# Altium PCB Humidifier.PcbDoc
Units mm, origin at the board's own origin, x right, y up, seen from the top; angles counter-clockwise.
Board outline 35.25 x 32.02 mm, 2 copper layers (Top Layer, Bottom Layer); 24 components, 20 nets, 100 pads, 52 vias.
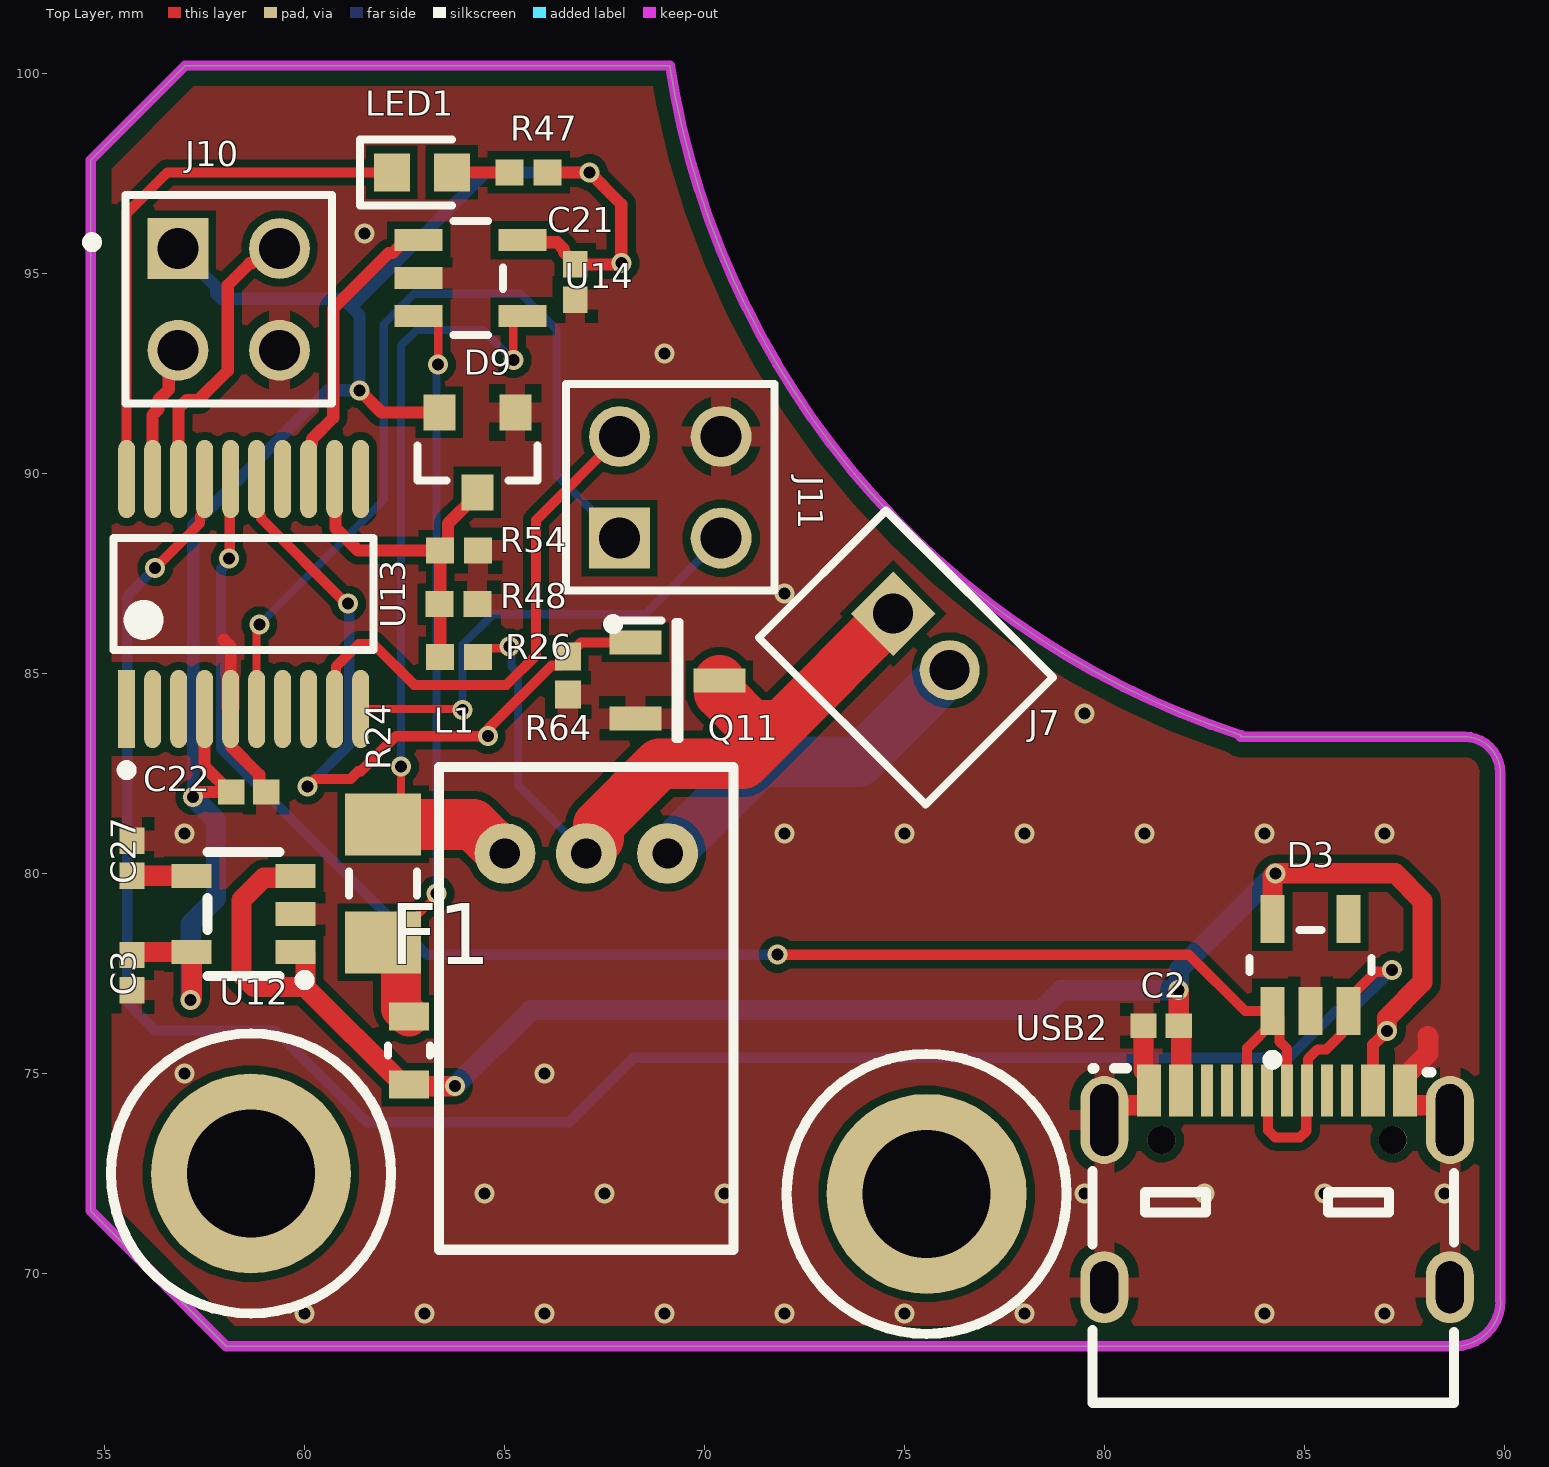
[diagram p0: Top Layer view]
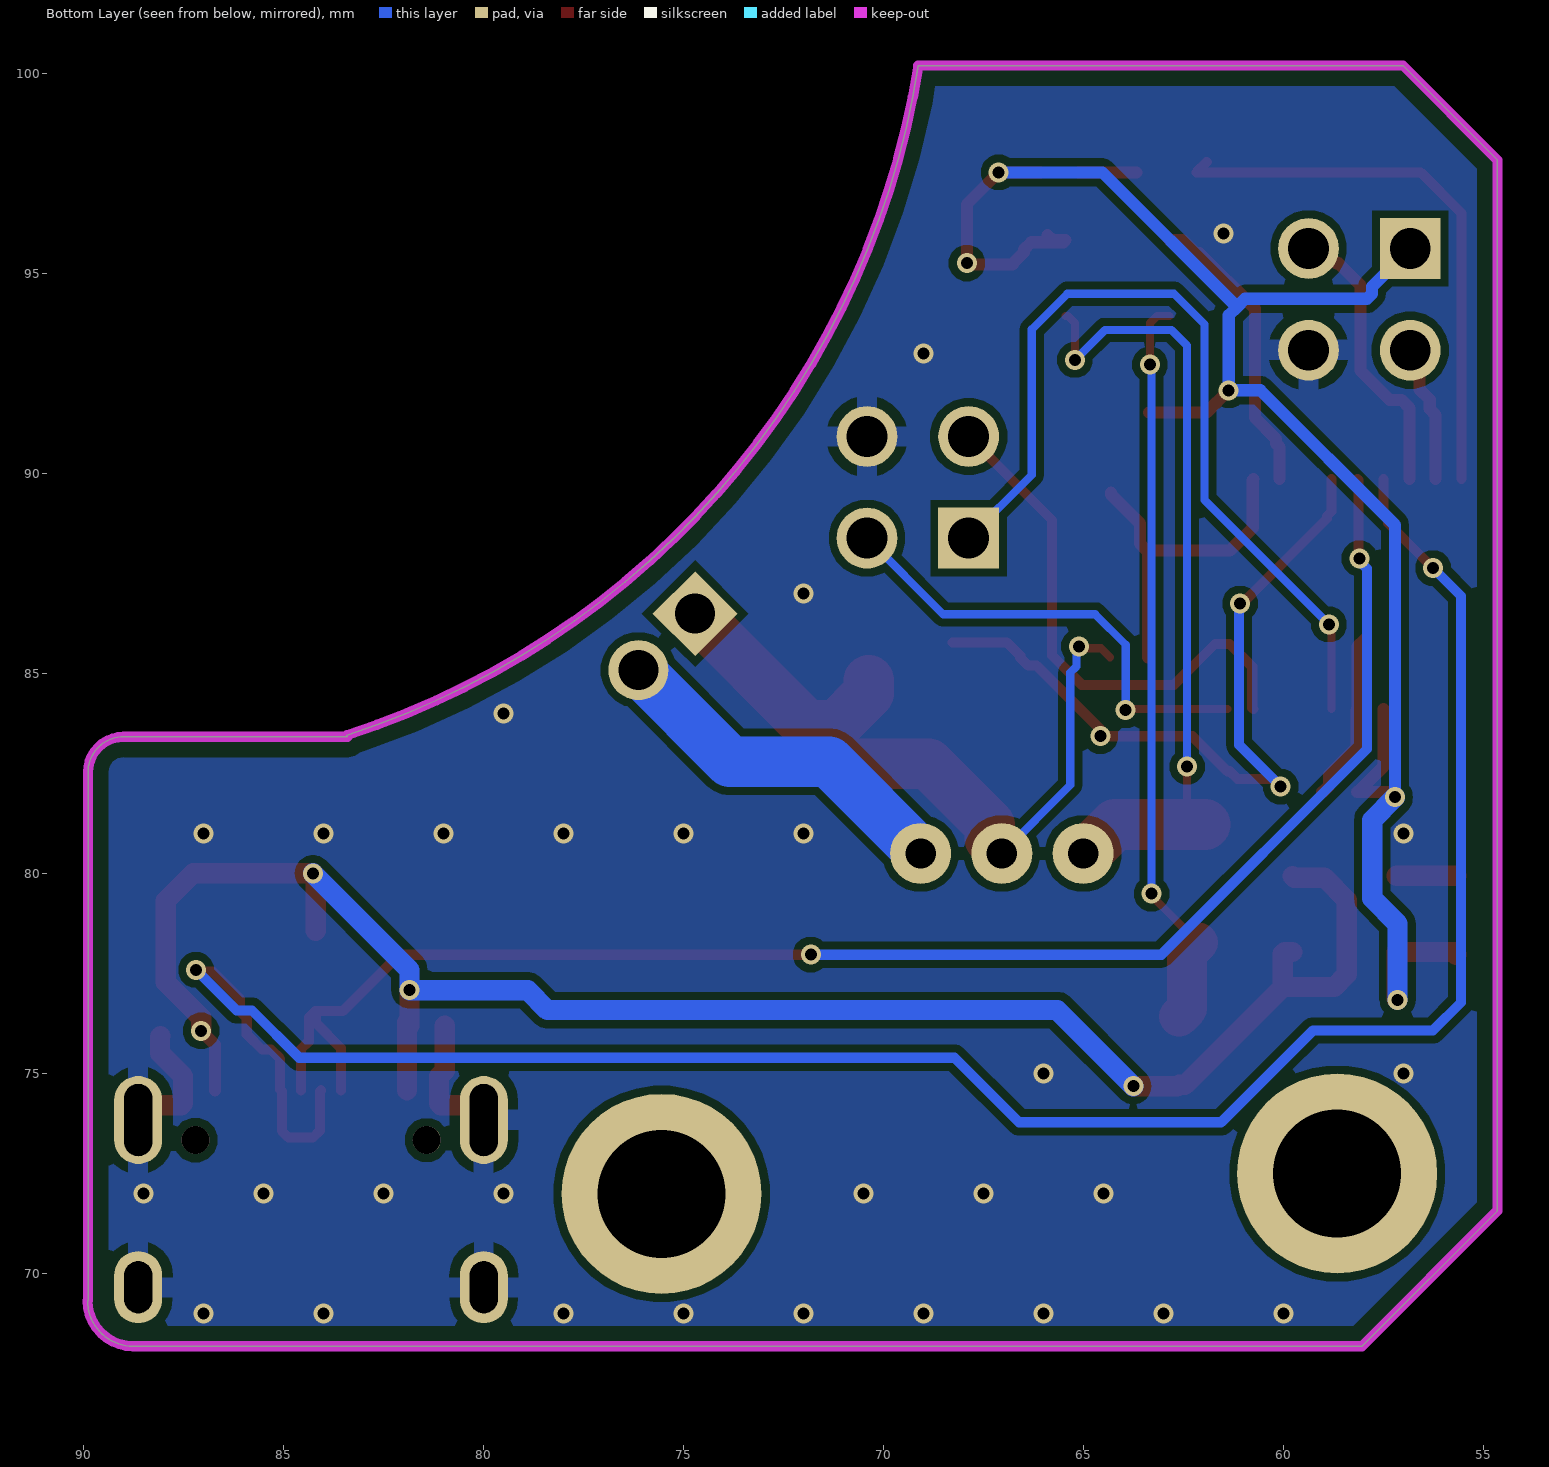
[diagram p1: Bottom Layer view, seen from below]

## Layer stack, top to bottom
Top Solder: solder mask 0.0102, Solder Resist, Dk 3.5
Top Layer: signal copper 0.0356
Dielectric 1: dielectric 0.32, FR-4, Dk 4.8
Bottom Layer: signal copper 0.0356
Bottom Solder: solder mask 0.0102, Solder Resist, Dk 3.5

## Board outline
54.654,71.56 54.654,97.834 57.013,100.193 69.124,100.193 69.13,100.194 ccw(c89.879,103.435) 83.416,83.454 83.402,83.412 89,83.412 cw(c89,82.525) 89.888,82.525 89.888,69.319 89.9,69.319 cw(c88.757,69.319) 88.757,68.176 58.038,68.176

## Design rules (kind name [scope] priority, off if disabled: settings)
AssemblyTestPointUsage AssemblyTestPointUsage_1 [All] p2:
AssemblyTestpoint AssemblyTestpoint_1 [All] p2: testpointundercomponent=TRUE minsize=1.016 maxsize=2.54 preferedsize=1.524 minholesize=0 maxholesize=1.016 preferedholesize=0.813 testpointgrid=0.025 usegrid=TRUE gridtolerance=0 allowsidetop=TRUE allowsidebottom=TRUE
Clearance "Board outline clearance" [All vs OnLayer('Keep-Out Layer')] p1: gap=0.381 ignorepadtopadclearanceinfootprint=FALSE except(0: Arc-Hole Track-Hole SMDPad-Hole THPad-Hole Via-Hole Fill-Hole Poly-Hole Region-Hole Text-Hole)
Clearance Clearance_1 [All] p2: gap=0.2 ignorepadtopadclearanceinfootprint=FALSE except(0: Arc-Hole Track-Hole SMDPad-Hole THPad-Hole Via-Hole Fill-Hole Poly-Hole Region-Hole Text-Hole; 0.17: SMDPad-SMDPad; 0.254: Track-Via; 0.33: Track-THPad)
ComponentClearance [InComponent('L1')] p1: gap=0 collisioncheckmode=3 verticalgap=0.254 showdistances=FALSE
ComponentClearance UFL [InComponent('RF_CON1')] p2: gap=0 collisioncheckmode=3 verticalgap=0.254 showdistances=FALSE
ComponentClearance ComponentClearance_1 [All] p3: gap=0.254 collisioncheckmode=3 verticalgap=0.254 showdistances=FALSE
DiffPairsRouting [All] p1: maxlimit=0.254 minlimit=0.203 mostfreqgap=0.254 toplayer_minwidth=0.203 toplayer_maxwidth=0.381 toplayer_prefwidth=0.381 bottomlayer_minwidth=0.203 bottomlayer_maxwidth=0.381 bottomlayer_prefwidth=0.381 maxuncoupledlength=12.7
DiffPairsRouting DiffPairsRouting_1 [All] p2: maxlimit=0.254 minlimit=0.254 mostfreqgap=0.254 toplayer_minwidth=0.381 toplayer_maxwidth=0.381 toplayer_prefwidth=0.381 bottomlayer_minwidth=0.381 bottomlayer_maxwidth=0.381 bottomlayer_prefwidth=0.381 maxuncoupledlength=12.7
FabricationTestPointUsage FabricationTestPointUsage_1 [All] p2: valid=0 allowmultiple=FALSE
FabricationTestpoint FabricationTestpoint_1 [All] p2: side=3 testpointundercomponent=TRUE minsize=1.016 maxsize=2.54 preferedsize=1.524 minholesize=0 maxholesize=1.016 preferedholesize=0.813 testpointgrid=0.025 allowsidetop=TRUE allowsidebottom=TRUE usegrid=TRUE gridtolerance=0
FanoutControl Fanout_LCC [IsLCC] p1: bgadir=Out bgaviamode=Centered fanoutstyle=Auto fanoutdirection=Alternating viagrid=0.025 // Fanout_LCC (Default Rule)
FanoutControl Fanout_BGA [IsBGA] p2: bgadir=Out bgaviamode=Centered fanoutstyle=Auto fanoutdirection=Alternating viagrid=0.025 // Fanout_BGA (Default Rule)
FanoutControl Fanout_Small [(CompPinCount < 5)] p3: bgadir=Out bgaviamode=Centered fanoutstyle=Auto fanoutdirection=OutThenIn viagrid=0.025 // Fanout_Small (Default Rule)
FanoutControl Fanout_SOIC [IsSOIC] p4: bgadir=Out bgaviamode=Centered fanoutstyle=Auto fanoutdirection=Alternating viagrid=0.025 // Fanout_SOIC (Default Rule)
FanoutControl Fanout_BGA_1 [IsBGA] p6: bgadir=Out bgaviamode=Centered fanoutstyle=Auto fanoutdirection=Alternating viagrid=0.025 // Fanout_BGA (Default Rule)
FanoutControl Fanout_LCC_1 [IsLCC] p7: bgadir=Out bgaviamode=Centered fanoutstyle=Auto fanoutdirection=Alternating viagrid=0.025 // Fanout_LCC (Default Rule)
FanoutControl Fanout_SOIC_1 [IsSOIC] p8: bgadir=Out bgaviamode=Centered fanoutstyle=Auto fanoutdirection=Alternating viagrid=0.025 // Fanout_SOIC (Default Rule)
FanoutControl Fanout_Small_1 [(CompPinCount < 5)] p9: bgadir=Out bgaviamode=Centered fanoutstyle=Auto fanoutdirection=OutThenIn viagrid=0.025 // Fanout_Small (Default Rule)
FanoutControl Fanout_Default_1 [All] p10: bgadir=Out bgaviamode=Centered fanoutstyle=Auto fanoutdirection=Alternating viagrid=0.025 // Fanout_Default (Default Rule)
Height Height_1 [All] p1: minheight=0 maxheight=50 prefheight=12.7
HoleSize HoleSize_1 [All] p1: absolutevalues=TRUE maxlimit=15 minlimit=0.2 maxpercent=80.000 minpercent=20.000
HoleToHoleClearance u8 [All vs InComponent('u8_1')] p1: gap=0 allowstackedmicrovias=TRUE
HoleToHoleClearance [All] p2: gap=0.254 allowstackedmicrovias=TRUE
LayerPairs LayerPairs_1 [All] p1: enforce=TRUE
MinimumAnnularRing [All] p1: minimumring=0.1
MinimumSolderMaskSliver MinimumSolderMaskSliver_1 [All] p1 off: minsoldermaskwidth=0.2
NetAntennae NetAntennae_1 [All] p2: netantennaetolerance=0
PasteMaskExpansion PasteMaskExpansion_1 [All] p2: expansion=0
PlaneClearance PlaneClearance_1 [All] p1: clearance=0.508
PlaneConnect PlaneConnect_1 [All] p1: planeconnectstyle=Relief reliefexpansion=0.508 reliefentries=4 reliefconductorwidth=0.7 reliefairgap=0.254
PolygonConnect Power [HasFootprint('DPAK IPD90P03P404ATMA1') Or HasFootprint('FP-PG-TO252-3-MFG') Or HasFootprint('FP-DEM8045C-MFG') Or HasFootprint('PCB-h4cyb3wxd4gf7j132tzl-1')] p1: connectstyle=Relief reliefconductorwidth=2.54 reliefentries=4 polygonreliefangle="90 Angle" airgapwidth=0.254
PolygonConnect Via [IsVia] p2: connectstyle=Direct reliefconductorwidth=0.254 reliefentries=4 polygonreliefangle="90 Angle" airgapwidth=0.254
PolygonConnect [All] p3: connectstyle=Relief reliefconductorwidth=0.508 reliefentries=4 polygonreliefangle="90 Angle" airgapwidth=0.254
PolygonConnect Power_net [InNet('VPOWER')] p4: connectstyle=Relief reliefconductorwidth=1 reliefentries=4 polygonreliefangle="90 Angle" airgapwidth=0.25
PolygonConnect Power_netGND_SHUNT [InNet('GND SHUNT')] p5: connectstyle=Relief reliefconductorwidth=1 reliefentries=4 polygonreliefangle="90 Angle" airgapwidth=0.25
RoutingCorners RoutingCorners_1 [All] p2: cornerstyle=45-Degree minsetback=2.54 maxsetback=2.54
RoutingLayers RoutingLayers_1 [All] p2: top layer_v5=TRUE bottom layer_v5=TRUE
RoutingPriority RoutingPriority_1 [All] p2: routingpriority=0
RoutingTopology RoutingTopology_1 [All] p2: topology=Shortest
RoutingVias RoutingVias_1 [All] p1: holewidth=0.3 width=0.5 viastyle="Through Hole" minholewidth=0.2 minwidth=0.4 maxholewidth=0.711 maxwidth=1.27
ShortCircuit ShortCircuit_Antenna [InNet('NetC10_2')] p1: allowed=TRUE
ShortCircuit ShortCircuit_1 [All] p2: allowed=FALSE
SilkToSilkClearance SilkToSilkClearance_1 [All] p1: silktosilkclearance=0
SilkToSolderMaskClearance SilkToSolderMaskClearance_1 [IsPad] p1: minsilkscreentomaskgap=0 clearancetoexposedcopper=TRUE
SolderMaskExpansion [All] p1: expansion=0.102 istentingtop=FALSE
SolderMaskExpansion SolderMaskExpansion_1 [All] p2: expansion=0.102 istentingtop=FALSE
UnRoutedNet UnRoutedNet_1 [All] p1:
UnpouredPolygon UnpouredPolygon_1 [All] p2:
Width Width_GSM_ANTENNA_1 [InNet('NetC10_2')] p1: maxlimit=0.35 minlimit=0.35 preferedwidth=0.35
Width Width_GSM_ANTENNA_2 [InNet('NetC9_2')] p2: maxlimit=0.35 minlimit=0.35 preferedwidth=0.35
Width Width_1 [All] p3: maxlimit=8 minlimit=0.1 preferedwidth=0.2
13 further rules are at their usual default settings.

## Components (designator, comment, footprint, x,y, rotation, side; value= is the part's Value field where it differs from the comment)
C2 "10uF 0402 X5R 10V" CAPC1005X55X25NL5T10 81.412,76.187 r0 top
C3 "1uF 0402 X5R 25V" CAPC1005X55X25NL5T10 55.68,77.516 r90 top
C21 "100nF 0402 X7R 50V" CAPC1005X55X25NL5T10 66.767,94.783 r90 top
C22 "1uF 0402 X5R 25V" CAPC1005X55X25NL5T10 58.601,82.029 r180 top
C27 "1uF 0402 X5R 25V" CAPC1005X55X25NL5T10 55.68,80.378 r270 top
D3 "ESDA5V3SC5" FP-SOT23-5L-MFG 85.144,77.711 r90 top value=320pF
D9 "BAT54S-7-F" FP-SOT23-MFG 64.316,90.522 r270 top
F1 "MF-FSMF050X-2" FP-MF-FSMF-MFG 62.611,75.565 r90 top value=0.1-0.8Ω
J7 "B2B-PH-K-S(LF)(SN)" JST-B2B-PH-K-S_V 75.031,85.395 r315 top
J10 "HTSW-102-07-G-D" FP-HTSW-102-07-G-D-MFG 58.103,94.348 r270 top
J11 "HTSW-102-07-G-D" FP-HTSW-102-07-G-D-MFG 69.142,89.649 r0 top
L1 "33uH+680uH" IND-THT_TRIPOD 67.04,80.495 r180 top
LED1 "150060GS55040" LEDC1608X50N 62.929,97.523 r0 top
Q11 "IRLML6244TRPBF" SOT95P237X112-3N 69.319,84.823 r0 top
R24 "0.02R 1206 0.5W 1%" CAPC3216X180X55ML20T25 61.96,79.748 r270 top
R26 "10k 0402 0.1%" RESC1005X40X25ML05T10 63.863,85.401 r0 top
R47 "1k 0402 1%" RESC1005X40X25ML05T10 65.596,97.523 r180 top
R48 "1k 0402 1%" RESC1005X40X25ML05T10 63.841,86.728 r0 top
R54 "1k 0402 1%" RESC1005X40X25ML05T10 63.863,88.068 r0 top
R64 "1k 0402 1%" RESC1005X40X25ML05T10 66.582,84.94 r270 top
U12 "SPX3819M5-L-3-3/TR" SOT-23-5_L3.0-W1.7-P0.95-LS2.8-BR 58.474,78.981 r0 top
U13 "STM32G030F6P6TR" FP-TSSOP20-YA-IPC_A 58.474,86.982 r90 top
U14 "Texas Instruments INA180A3IDBVR" SOT23-5_D 64.15,94.88 r270 top
USB2 "XKB U262-16XN-4BVC11" U262-161N-4BVC11 84.312,72.113 r0 top

## Footprints (in the part's own frame and the unit in brackets; to place one, negate y for a bottom-side part, rotate by r counter-clockwise, add the part's x,y. Pads: shape width x height; smd on the part's side, far side on the other; paste and mask are expansions set on the pad)
CAPC1005X55X25NL5T10 [mm] "Chip Capacitor, 2-Leads, Body 1.05x0.55mm, IPC Medium Density"
  rect 0.66x0.62 smd: 1(-0.44,0) 2(0.44,0)
  body extent -0.53,-0.28 0.53,0.28, height 0.55
CAPC3216X180X55ML20T25 [mm]
  rect 1.55x1.9 smd: 1(-1.475,0) 2(1.475,0)
  silkscreen extent -0.3,-0.85 0.3,0.85, body extent -1.7,-0.9 1.7,0.9, height 1.8
FP-HTSW-102-07-G-D-MFG [mm]
  rect 1.52x1.52 hole 1.02 paste-1000 mask+0: 1(-1.27,-1.27)
  round 1.52 hole 1.02 paste-1000 mask+0: 2(-1.27,1.27) 3(1.27,-1.27) 4(1.27,1.27)
  silkscreen extent -2.6,-3.54 2.6,2.58, body extent -2.7,-2.68 2.7,2.68, height 0.25
FP-MF-FSMF-MFG [mm]
  rect 0.7x1 smd paste+0 mask+0: 1(-0.85,0) 2(0.85,0)
  silkscreen extent -0.13,-0.53 0.13,0.53, body extent -1.3,-0.63 1.3,0.63, height 0.25
FP-SOT23-5L-MFG [mm]
  rect 1.2x0.6 smd paste+0 mask+0: 1(-1.15,0.95) 2(-1.15,0) 3(-1.15,-0.95) 4(1.15,-0.95) 5(1.15,0.95)
  silkscreen extent -2.5,-1.53 0.87,1.53, body extent -1.85,-1.63 1.85,1.63, height 0.25
FP-SOT23-MFG [mm]
  rect 0.9x0.8 smd paste+0 mask+0: 1(-1,0.95) 2(-1,-0.95) 3(1,0)
  silkscreen extent -0.18,-1.5 0.7,1.5, body extent -1.55,-1.6 1.55,1.6, height 0.25
FP-TSSOP20-YA-IPC_A [mm]
  rect 1.955x0.421 smd paste+0 mask+0: 1(-2.875,2.925)
  rrect100% 1.955x0.421 smd paste+0 mask+0: 2(-2.875,2.275) 3(-2.875,1.625) 4(-2.875,0.975) 5(-2.875,0.325) 6(-2.875,-0.325) 7(-2.875,-0.975) 8(-2.875,-1.625) 9(-2.875,-2.275) 10(-2.875,-2.925) 11(2.875,-2.925) 12(2.875,-2.275) 13(2.875,-1.625) 14(2.875,-0.975) 15(2.875,-0.325) 16(2.875,0.325) 17(2.875,0.975) 18(2.875,1.625) 19(2.875,2.275) 20(2.875,2.925)
  silkscreen extent -4.53,-3.25 1.4,3.25, body extent -4.35,-3.75 4.35,3.75, height 0.25
IND-THT_TRIPOD [mil]
  round 60 hole 30: 1(-80,0) 2(0,0) 3(80,0)
  silkscreen extent -145,-85 145,390
JST-B2B-PH-K-S_V [mm] "Connector, 2-Leads, Body 5.9x4.5mm, Pitch 2mm"
  rect 1.5x1.5 hole 1: 1(-1,0.55)
  round 1.5 hole 1: 2(1,0.55)
  silkscreen extent -2.95,-2.25 2.95,2.25, body extent -2.95,-2.25 2.95,2.25, height 6
LEDC1608X50N [mm]
  rect 0.9x0.95 smd: 1(-0.75,0) 2(0.75,0)
  silkscreen extent -1.55,-0.82 0.75,0.82, body extent -0.8,-0.4 0.8,0.4, height 0.4
RESC1005X40X25ML05T10 [mm] "Chip Resistor, 2-Leads, Body 1.00x0.50mm, IPC Low Density"
  rect 0.7x0.65 smd: 1(-0.475,0) 2(0.475,0)
  body extent -0.53,-0.27 0.53,0.28, height 0.4
SOT23-5_D [mm]
  rect 0.55x1.2 smd: 1(-0.95,-1.3) 2(0,-1.3) 3(0.95,-1.3) 4(0.95,1.3) 5(-0.95,1.3)
  silkscreen extent -1.42,-0.43 1.42,0.81, body extent -1.45,-1.36 1.45,1.36, height 1.45
SOT95P237X112-3N [mm]
  rect 1.3x0.6 smd: 1(-1.05,0.95) 2(-1.05,-0.95) 3(1.05,0)
  silkscreen extent -1.7,-1.46 0.05,1.5, body extent -1.18,-1.46 1.18,1.46, height 1.12
SOT-23-5_L3.0-W1.7-P0.95-LS2.8-BR [mm]
  rect 1x0.6 smd: 1(1.3,-0.95) 2(1.3,0) 3(1.3,0.95) 4(-1.3,0.95) 5(-1.3,-0.95)
  silkscreen extent -0.9,-1.78 1.65,1.55
U262-161N-4BVC11 [mm]
  rect 0.6x1.3 smd: A1B12(-3.2,2.461) A4B9(-2.4,2.461) B1A12(3.2,2.461) B4A9(2.4,2.461)
  rect 0.3x1.3 smd: A5(-1.25,2.461) A6(-0.25,2.461) A7(0.25,2.461) A8(1.25,2.461) B5(1.75,2.461) B6(0.75,2.461) B7(-0.75,2.461) B8(-1.75,2.461)
  oval 1.2x1.8 hole 0.7 slot 1.3 at 90 deg: SHELL(-4.32,-2.461) SHELL(4.32,-2.461)
  oval 1.2x2.2 hole 0.7 slot 1.8 at 90 deg: SHELL(-4.32,1.719) SHELL(4.32,1.719)
  round 0.7 hole 0.7 unplated: ""(-2.89,1.219) ""(2.89,1.219)
  silkscreen extent -4.62,-5.35 4.42,3.01, body extent -4.47,-5.02 4.43,2.54, height 3.3

## Part data
C2: library part CMP-1662-00020-1, LCSC_PN=C77000, ComponentLink1Description="Manufacturer URL", ComponentLink1URL=http://www.murata.com/, ComponentLink2Description=Datasheet, ComponentLink2URL=http://psearch.en.murata.com/capacitor/product/GRM155R60J105KE19%23.pdf
C3 C22 C27: library part CMP-1662-00020-1, LCSC_PN=C77009, ComponentLink1Description="Manufacturer URL", ComponentLink1URL=http://www.murata.com/, ComponentLink2Description=Datasheet, ComponentLink2URL=http://psearch.en.murata.com/capacitor/product/GRM155R60J105KE19%23.pdf
C21: library part CMP-1662-00020-1, LCSC_PN=C77020, ComponentLink1Description="Manufacturer URL", ComponentLink1URL=http://www.murata.com/, ComponentLink2Description=Datasheet, ComponentLink2URL=http://psearch.en.murata.com/capacitor/product/GRM155R60J105KE19%23.pdf
D3: library part CMP-12225-000054-1, "TVS DIODE 3V SOT23-5L", Breakdown Voltage=5.3V, Capacitance=320pF, Clamping Voltage=21V, LCSC_PN=C111204, Manufacturer=STMicroelectronics, Max Junction Temp=+150°C, Package=SOT23-5L, Peak Pulse Current=22A, Peak Pulse Power=300W, Reverse Standoff Voltage=3V, Temperature="-55°C to +150°C", Temperature Range Low=-55°C, Automotive=No, Category=Diode, ComponentLink2Description=Datasheet, ComponentLink2URL=https://www.st.com/resource/en/datasheet/esda5v3sc5.pdf, Device Class L1="Circuit Protection", Device Class L2="TVS Diodes", Device Class L3=unset, Digikey Description="TVS DIODE 3V SOT23-5L", Direction=Unidirectional, Height=1.45mm, Ipc Land Pattern Name=SOT95P280X118-5, Lead Free=Yes, Manufacturer Part Number=ESDA5V3SC5, Mouser Description="TVS Diodes / ESD Suppressors 5.3V 500W Unidirect", Number Of Channels=4, Octopart=https://octopart.com/esda5v3sc5-stmicroelectronics-347709, RoHS=TRUE, Standoff Height=0mm, Temperature Range High=+150°C
D9: library part CMP-1667-00006-2, "DIODE ARRAY SCHOTTKY 30V SOT23-3", Average Rectified Current=200mA, Capacitance=10pF, Case/Package=SOT-23, Forward Voltage=800mV, LCSC_PN=C83574, Max Forward Surge Current (Ifsm)=600mA, Max Operating Temperature=150°C, Max Power Dissipation=200mW, Max Repetitive Reverse Voltage (Vrrm)=30V, Min Operating Temperature=-65°C, Package Quantity=3000, Peak Reverse Current=2uA, Contact Plating=Tin, Current Rating=200mA, Forward Current=200mA, Height=1mm, Lead Free="Lead Free", Length=2.9mm, Max Reverse Voltage (DC)=30V, Mount="Surface Mount", Number of Pins=3, Packaging="Tape and Reel", Peak Non-Repetitive Surge Current=600mA, Power Dissipation=200mW, Power Rating=200mW, Radiation Hardening=No, REACH SVHC="No SVHC", Reverse Recovery Time=5ns, Termination=SMD/SMT, Voltage Rating (DC)=30V, Weight=0.000282oz, Width=1.3mm
F1: library part CMP-07400-000010-1, "PTC RESET FUSE 6V 500MA 0603", Ambient Temperature Range High=+85°C, Ambient Temperature Range Low=-40°C, Current Rating=40A, Hold Current=0.5A, Manufacturer="Bourns Inc.", Package=MF-FSMF, Resistance=0.1-0.8Ω, Temperature="-40°C to +85°C", Trip Current=1A, Voltage Rating=6V, Automotive=No, Category=Fuse, ComponentLink2Description=Datasheet, ComponentLink2URL=https://www.bourns.com/docs/Product-Datasheets/mffsmf.pdf, Device Class L1="Circuit Protection", Device Class L2="PTC Resettable Fuses", Device Class L3=unset, Digikey Description="PTC RESET FUSE 6V 500MA 0603", Height=1mm, Lead Free=Yes, Manufacturer Part Number=MF-FSMF050X-2, Mouser Description="Resettable Fuses - PPTC 6volts 40amps", Octopart=https://octopart.com/mf-fsmf050x-2-bourns-10470804, RoHS=TRUE, Temperature Range High=+85°C, Temperature Range Low=-40°C, Trip Time=0.1s
J7: library part CMP-2000-05162-1, "Male Header, Pitch 2 mm, 1 x 2 Position, Height 6 mm, Tail Length 3.4 mm, -25 to 85 degC, RoHS, Bulk", LCSC_PN=C131337, Manufacturer=JST, Datasheet URL=http://datasheet.octopart.com/B2B-PH-K-S%28LF%29%28SN%29-JST-datasheet-8324864.pdf, Datasheet Version=Nov-08, Manufacturer URL=http://www.jst.com/home2.html, No of Positions=2, Pitch=2mm, Style/Orientation=StraightHeader/Plug, Termination=Crimp, Type=ShroudedHeader
J10 J11: library part CMP-02766-000010-1, "CONN HEADER VERT 4POS 2.54MM", Current Rating=6.3A, LCSC_PN=C2685136, Manufacturer=Samtec, Temperature="-55°C to +125°C", Temperature Range High=+125°C, Temperature Range Low=-55°C, Voltage Rating=550V, Automotive=No, Category=Conn, ComponentLink2Description=Datasheet, ComponentLink2URL=http://suddendocs.samtec.com/catalog_english/htsw_th.pdf, Conn Gender=Male, Conn Orientation=Straight, Contact Material=Gold,Nickel, Device Class L1=Connectors, Device Class L2="Headers and Wire Housings", Device Class L3=unset, Digikey Description="CONN HEADER VERT 4POS 2.54MM", Height=8.71mm, Lead Free=Yes, Manufacturer Part Number=HTSW-102-07-G-D, Mouser Description="Conn Unshrouded Header HDR 4 POS 2.54mm Solder ST Thru-Hole Bag", Number of Contacts=4, Number of Rows=2, Octopart=https://octopart.com/htsw-102-07-g-d-samtec-10531767, Package=HTSW-102-07-G-D, Pitch=2.54mm, RoHS=TRUE
L1: library part tripod_inductor
LED1: "LED", LCSC_PN=C84266, Manufacturer_Name="Wurth Elektronik", Mouser Part Number=710-150060GS55040, Datasheet Link=https://katalog.we-online.de/led/datasheet/150060GS55040.pdf, Height=0.5mm, Manufacturer_Part_Number=150060GS55040, Mouser Price/Stock=https://www.mouser.co.uk/ProductDetail/Wurth-Elektronik/150060GS55040?qs=fAHHVMwC%252Bbhr5Aln2oA6Nw%3D%3D
Q11: "Transistor", LCSC_PN=C143946, Manufacturer_Name=Infineon, Mouser Part Number=942-IRLML6244TRPBF, Arrow Part Number=IRLML6244TRPBF, Arrow Price/Stock=https://www.arrow.com/en/products/irlml6244trpbf/infineon-technologies-ag?region=nac, Datasheet Link=http://www.infineon.com/dgdl/irlml6244pbf.pdf?fileId=5546d462533600a4015356686fed261f, Height=1.12mm, Manufacturer_Part_Number=IRLML6244TRPBF, Mouser Price/Stock=https://www.mouser.co.uk/ProductDetail/Infineon-IR/IRLML6244TRPBF?qs=9%252BKlkBgLFf1HkY%2F2U%252BIhLQ%3D%3D
R24: library part CMP-0abdc173b10ad57a-1, Case/Package=1206, LCSC_PN=C723441, Manufacturer Part Number=WSLP12065L000FEA, Power=1W, Resistance=0,024, Lifecycle Status="Not Listed by Manufacturer", Octopart URL=https://octopart.com/1-2176055-0-te+connectivity-46440145, OctopartID=0abdc173b10ad57a, Packaging="Tape & Reel (TR)"
R26: library part CMP-2002-07472-1, LCSC_PN=C190095
R47 R48 R54 R64: library part CMP-2002-07472-1, LCSC_PN=C106235
U12: BOM_JLCPCB Part Class="Extended Part", BOM_Manufacturer=EXAR, LCSC_PN=C9055, BOM_Manufacturer Part=SPX3819M5-L-3-3/TR, BOM_Supplier=LCSC, BOM_Supplier Part=C9055, spicePre=U, spiceSymbolName=SPX3819M5-L-3-3/TR
U13: library part CMP-12105-000113-1, "IC MCU 32BIT 32KB FLASH 20TSSOP", LCSC_PN=C529330, RoHS Compliant=Yes
U14: library part CMP-29d7e410373ef610-1, "26V, Low- or High-Side Voltage Output Current Sense Amplifier 5-SOT-23 -40 to 125", LCSC_PN=C122882, Manufacturer Part Number=INA180A3IDBVR, Lead-Free Status="Lead Free", Lifecycle Status=Active, Octopart URL=http://octopart.com/ina180a1idbvr-texas+instruments-80558991, OctopartID=29d7e410373ef610, RoHS=Compliant
USB2: BOM_JLCPCB Part Class="Extended Part", BOM_Manufacturer="XKB Enterprise", BOM_Manufacturer Part=U262-16XN-4BVC11, LCSC_PN=C319148, BOM_Supplier=LCSC, BOM_Supplier Part=C319148, Contributor=LCSC

## Free pads (board coordinates)
  round 5 hole 3.2: 0(58.658,72.494) 0(75.549,71.986)

## Via types
v1: diameter 0.5, hole 0.3, Top Layer to Bottom Layer, tented both sides, 50 vias
v2: diameter 0.5, hole 0.3, Top Layer to Bottom Layer, 2 vias

## Nets (pads, with @x,y where several pads share a name; then routed paths per layer and width w, separated by ;. In a path a pad name is that pad's centre, name@x,y a point inside that pad or via, vN(x,y) a via of type N, cw(c..) or ccw(c..) an arc to the next point about the centre after c; other vN are vias at no path point)
3v3_HUM@100mA: C3.2 C21.2 C22.2 D9.2 J10.1 R47.1 U12.5 U13.4 U14.5 | length 47.9
  Top Layer w0.305: v1(57.214,81.902) 57.341,82.029 C22.2@58.141,82.029 ; U13.4 57.499,82.671 C22.2@58.141,82.029 ; C22.2 C22.2@58.141,82.029 ; v1(61.37,92.075) 61.923,91.522 D9.2 ; U14.5@65.898,95.953 65.775,95.83 U14.5 65.506,95.774 66.306,95.774 66.485,95.596 66.485,95.525 66.767,95.243 C21.2 67.995,95.223 68.009,95.237 67.932,95.237 v1(67.916,95.253) 67.916,96.726 v1(67.12,97.523) R47.1
  Top Layer w0.508: C3.2 55.68,77.975 55.736,78.031 U12.5 57.174,76.859 v1(57.15,76.835)
  Bottom Layer w0.305: J10.1 57.786,94.665 57.786,94.487 57.912,94.361 60.96,94.361 61.165,94.156 ; v1(57.214,81.902) 57.214,88.71 60.579,92.075 v1(61.37,92.075) 61.37,93.951 61.165,94.156 ; v1(67.12,97.523) 64.532,97.523 61.165,94.156
  Bottom Layer w0.508: v1(57.15,76.835) 57.15,78.74 57.785,79.375 57.785,81.331 v1(57.214,81.902)
\R\S\T\: J11.1 U13.6 | length 21.8
  Top Layer w0.203: U13.6 58.799,86.154 v1(58.865,86.22)
  Bottom Layer w0.203: v1(58.865,86.22) 61.976,89.331 61.976,93.726 62.738,94.488 65.405,94.488 66.294,93.599 66.294,89.957 J11.1
DGND: C2.1 C3.1 C21.1 C22.1 C27.1 D3.2 D9.1 J10.4 J11.4 Q11.2 R48.2 R54.2 R64.2 U12.2 U13.5 U14.2 USB2.A1B12 USB2.B1A12 USB2.SHELL | length 10.8
  Top Layer w0.305: 57.976,85.839 58.149,85.666 U13.5 58.171,84.084 58.171,83.157 58.863,82.465 58.863,82.187 59.021,82.029 C22.1
  Top Layer w0.508: USB2.SHELL@79.992,73.831 79.992,73.883 80.311,74.203 81.066,74.203 81.112,74.249 USB2.A1B12 81.112,74.924 80.972,75.064 C2.1 ; 88.075,75.933 88.087,75.92 88.087,75.5 87.512,74.924 USB2.B1A12 87.512,74.249 87.558,74.203 88.312,74.203 88.632,73.883 USB2.SHELL@88.632,73.831
  other v1: 60,69 63,69 66,69 69,69 72,69 75,69 78,69 84,69 87,69 64.5,72 67.5,72 70.5,72 79.5,72 82.5,72 85.5,72 88.5,72 57,75 66,75 57,81 72,81 75,81 78,81 81,81 84,81 87,81 79.5,84 72,87 69,93 61.5,96
HUM_CURRENT: U13.13 U14.1 | length 7.4
  Top Layer w0.305: U13.13 60.099,90.656 60.186,90.743 60.186,90.858 60.714,91.386 60.714,94.118 62.104,95.508 62.202,95.508 62.525,95.83 U14.1
HUM_CURRENT+: F1.2 R24.2 U14.3 | length 18.8
  Top Layer w0.2: R24.2 62.135,78.273 63.246,79.384 63.246,79.435 v2(63.3,79.489)
  Top Layer w0.203: U14.3 63.166,93.931 63.339,93.757 v1(63.339,92.717)
  Top Layer w1: R24.2@62.135,78.273 62.41,77.998 62.41,76.616 F1.2
  Bottom Layer w0.203: v1@63.29,92.717 63.3,92.707 v2(63.3,79.489)
HUM_CURRENT-: L1.3 R24.1 U14.4 | length 20
  Top Layer w0.203: R24.1 62.411,81.674 v1(62.411,82.664) ; v1(65.215,92.834) 65.215,93.757 65.388,93.931 U14.4
  Top Layer w1.27: R24.1 64.211,81.223 64.939,80.495 L1.3
  Bottom Layer w0.203: v1(62.411,82.664) 62.411,93.195 62.802,93.586 64.463,93.586 v1(65.215,92.834)
HUM_PWM: Q11.1 R64.1 U13.15 | length 18.9
  Top Layer w0.254: U13.15 58.799,89.045 58.911,88.933 58.911,88.868 61.038,86.741 v1(61.087,86.741) ; v1(60.071,82.169) 60.261,82.359 61.15,82.359 61.341,82.55 61.404,82.55 62.28,83.426 v1(64.58,83.426) 64.58,83.6 66.171,85.192 66.384,85.192 66.582,85.39 R64.1 66.582,85.44 66.915,85.773 Q11.1
  Bottom Layer w0.254: v1(60.071,82.169) 61.115,83.213 61.115,86.713 v1(61.087,86.741)
HUMIDIFIER_SCL: D3.1 U13.16 USB2.A7 USB2.B7 | length 40.2
  Top Layer w0.254: v1(58.103,87.871) 58.126,87.894 58.126,89.834 U13.16 ; v1(71.819,77.965) 82.106,77.965 83.51,76.561 D3.1 ; USB2.B7 83.562,75.629 84.194,76.261 D3.1 ; USB2.A7 84.562,75.605 84.367,75.8 84.367,76.388 D3.1
  Bottom Layer w0.254: v1(58.103,87.871) 58.103,87.804 57.912,87.614 57.912,83.109 63.056,77.965 v1(71.819,77.965)
HUMIDIFIER_SDA: D3.3 U13.17 USB2.A6 USB2.B6 | length 55.7
  Top Layer w0.254: v1(56.261,87.63) 57.386,88.755 57.386,88.933 57.499,89.045 U13.17 ; USB2.A6 84.085,74.551 84.085,73.573 84.265,73.393 84.878,73.393 85.039,73.554 85.039,74.551 USB2.B6 85.085,74.597 85.085,75.359 85.318,75.592 85.538,75.592 85.921,75.976 85.921,76.388 D3.3 86.094,76.861 86.77,77.537 87.139,77.537 v1(87.186,77.584)
  Bottom Layer w0.254: v1(56.261,87.63) 55.563,86.932 55.563,76.771 56.261,76.073 59.26,76.073 61.559,73.774 66.612,73.774 68.226,75.388 84.609,75.388 85.789,76.568 86.17,76.568 v1(87.186,77.584)
LED: LED1.1 U13.20 | length 14.1
  Top Layer w0.254: U13.20 55.549,96.5 56.571,97.523 LED1.1 LED1.1@61.921,97.781
NetC27_2: C27.2 U12.4 | length 1.5
  Top Layer w0.508: C27.2 55.683,79.935 57.17,79.935 U12.4
NetJ7_2: J7.2 L1.1 | length 9
  Bottom Layer w1.27: L1.1 71.365,82.788 73.838,82.788 J7.2
NetLED1_2: LED1.2 R47.2 | length 1.4
  Top Layer w0.305: LED1.2 R47.2
PIEZO+: J7.1 L1.2 Q11.3 R26.2 | length 19.5
  Top Layer w0.203: R26.2 64.562,85.624 65.07,85.624 v1(65.117,85.672)
  Top Layer w1.27: L1.2 67.04,80.563 67.345,80.868 67.345,81.21 68.873,82.738 70.959,82.738 71.918,83.697 ; Q11.3 70.369,84.503 71.174,83.697 71.918,83.697 ; J7.1 71.918,83.697
  Bottom Layer w0.203: v1(65.117,85.672) 65.174,85.615 65.174,85.173 65.332,85.016 65.332,82.203 L1.2
SWD_CLK: J10.3 U13.19 | length 3.6
  Top Layer w0.305: U13.19 56.199,91.46 56.344,91.605 56.344,91.841 56.6,92.098 56.6,92.845 J10.3 ; J10.3@56.344,92.97 J10.3@56.452,93.078
SWD_IO: J10.2 U13.18 | length 6.9
  Top Layer w0.305: U13.18 56.849,91.632 57.052,91.836 57.347,91.836 58.075,92.563 58.075,94.701 58.626,95.253 58.678,95.253 58.992,95.566 J10.2@58.992,95.618
uC_Rx: J11.3 U13.10 | length 11.8
  Top Layer w0.203: U13.10 63.916,84.107 v1(63.945,84.078)
  Bottom Layer w0.203: v1(63.945,84.078) 63.945,85.712 64.707,86.474 68.507,86.474 J11.3
uC_Tx: J11.2 U13.9 | length 13.4
  Top Layer w0.254: U13.9 60.781,84.138 60.781,85.165 61.349,85.733 61.714,85.733 62.738,84.709 65.047,84.709 65.786,85.448 65.786,88.833 J11.2
V_PIEZO: D9.3 R26.1 R48.1 R54.1 U13.12 | length 8.6
  Top Layer w0.305: U13.12 60.771,89.835 60.771,88.632 61.335,88.068 R54.1 ; R26.1 63.388,86.728 R54.1 ; D9.3 64.316,89.472 63.586,88.742 63.586,88.241 63.413,88.068 R54.1
VUSB: C2.2 D3.5 F1.1 U12.1 U12.3 USB2.A4B9 USB2.B4A9 | length 47.3
  Top Layer w0.305: USB2.B4A9 86.712,75.713 v1(87.059,76.06)
  Top Layer w0.508: U12.1 59.974,78.031 60.02,77.985 60.02,77.156 ; U12.3 59.728,79.885 58.974,79.885 58.42,79.331 58.42,77.47 58.734,77.156 60.02,77.156 ; v2(63.754,74.676) 62.65,74.676 F1.1 62.461,74.715 60.02,77.156 ; C2.2 v1(81.852,77.076) ; USB2.A4B9 C2.2@81.912,76.279 ; D3.5@84.194,78.561 D3.5 84.194,79.926 v1(84.265,79.997) 87.262,79.997 87.944,79.315 87.944,77.27 87.059,76.385 v1(87.059,76.06)
  Bottom Layer w0.508: v2(63.754,74.676) 65.659,76.581 78.401,76.581 78.896,77.076 v1(81.852,77.076) 81.852,77.584 v1(84.265,79.997)
pads on no net: D3.4 U13.1 U13.2 U13.3 U13.7 U13.8 U13.11 U13.14 USB2. USB2.A5 USB2.A8 USB2.B5 USB2.B8

## Polygon pours and split planes (outlines as drawn)
DGND on Bottom Layer "DGND_L02_P000" (solid, remove dead copper, pour order 0): 48.768,103.505 84.709,103.505 94.234,93.98 94.234,65.405 90.297,61.468 54.737,61.468 48.387,67.818
DGND on Top Layer "DGND_L01_P001" (solid, remove dead copper, pour order 1): 48.768,103.505 84.709,103.505 94.234,93.98 94.234,65.405 90.297,61.468 54.737,61.468 48.387,67.818

## Keep-outs
Keep-Out Layer:
  lines w0.254: 69.124,100.193 60.108,100.193 57.013,100.193 54.654,97.834 54.654,71.56 58.038,68.176 70.733,68.176 88.757,68.176 ccw(c88.757,69.319) 89.9,69.319 ; 69.13,100.194 ccw(c89.879,103.435) 83.416,83.454 ; 83.402,83.412 89,83.412 cw(c89,82.525) 89.888,82.525 89.888,69.319

## Silkscreen, mask and mechanical layers (free items; w line width, h text height)
Top Overlay:
  circle w0.254: c58.658,72.494 r3.5
  circle w0.254: c75.549,71.986 r3.5